# EAGLE board stitched (EAGLE 7.7.0)
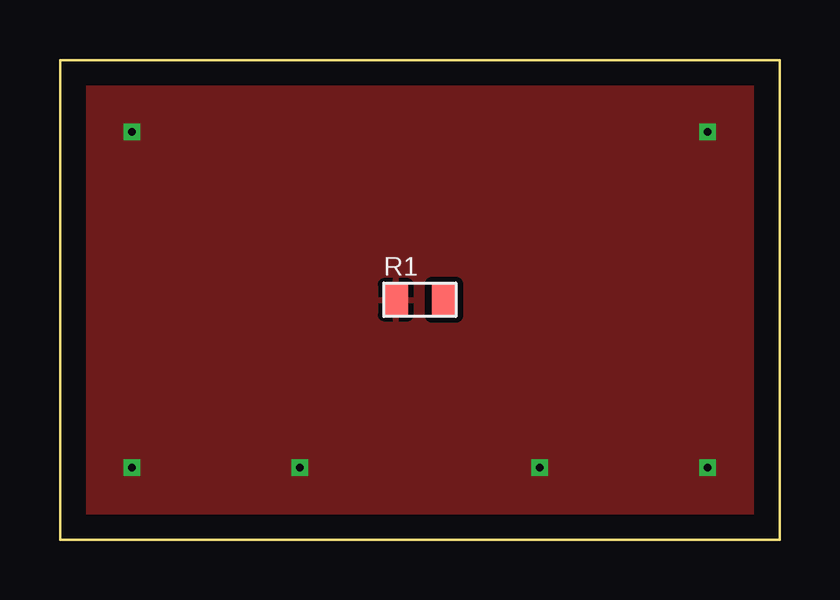
[diagram p0: board, top side]

Size 30 x 20 mm. Coordinates in mm from the lower left corner, seen from the top.
Outline: 0,0 30,0 30,20 0,20 0,0
Copper layers (1*16): Top 0.035mm / dielectric 1.5mm / Bottom 0.035mm
Design rules "default": minimum track width 10mil, minimum drill 0.6mm, track to track 8mil, track to pad 8mil, pad to pad 8mil, via to via 8mil, smd to smd 8mil, copper to edge 40mil, drill to drill 8mil, minimum pad ring 10mil, minimum via ring 8mil, stop-mask expansion 4mil, vias tented up to drill 0mil, thermal gap 10mil

## Footprints (pad centres in the part's own frame; a part is rotated, then mirrored left to right if it is on the bottom)
R0805 = smd 1 x 1.3: 1 -1,0; 2 1,0

## Placement (x,y rotation side)
R1  10k  [R0805]  15,10 0 top

## Library data of the parts
R1 = synth

## Nets
GND: R1.1

## Tracks (layer width: path | path; a pad name or v marks a point on that pad's centre or on a via)
GND  (via drill 0.3 pad 0.6)
  other vias: 3,3 10,3 20,3 27,3 3,17 27,17
  pour Top (isolate 0.3): 0.5,0.5 29.5,0.5 29.5,19.5 0.5,19.5